# Altium PCB BF83080_PCB.pcbdoc
Units mil, origin at the board's own origin, x right, y up, seen from the top; angles counter-clockwise.
Board outline 1489.2 x 1603.3 mil, 2 copper layers (Top Layer, Bottom Layer), stack 62.2 mil thick; 25 components, 19 nets, 101 pads, 40 vias.
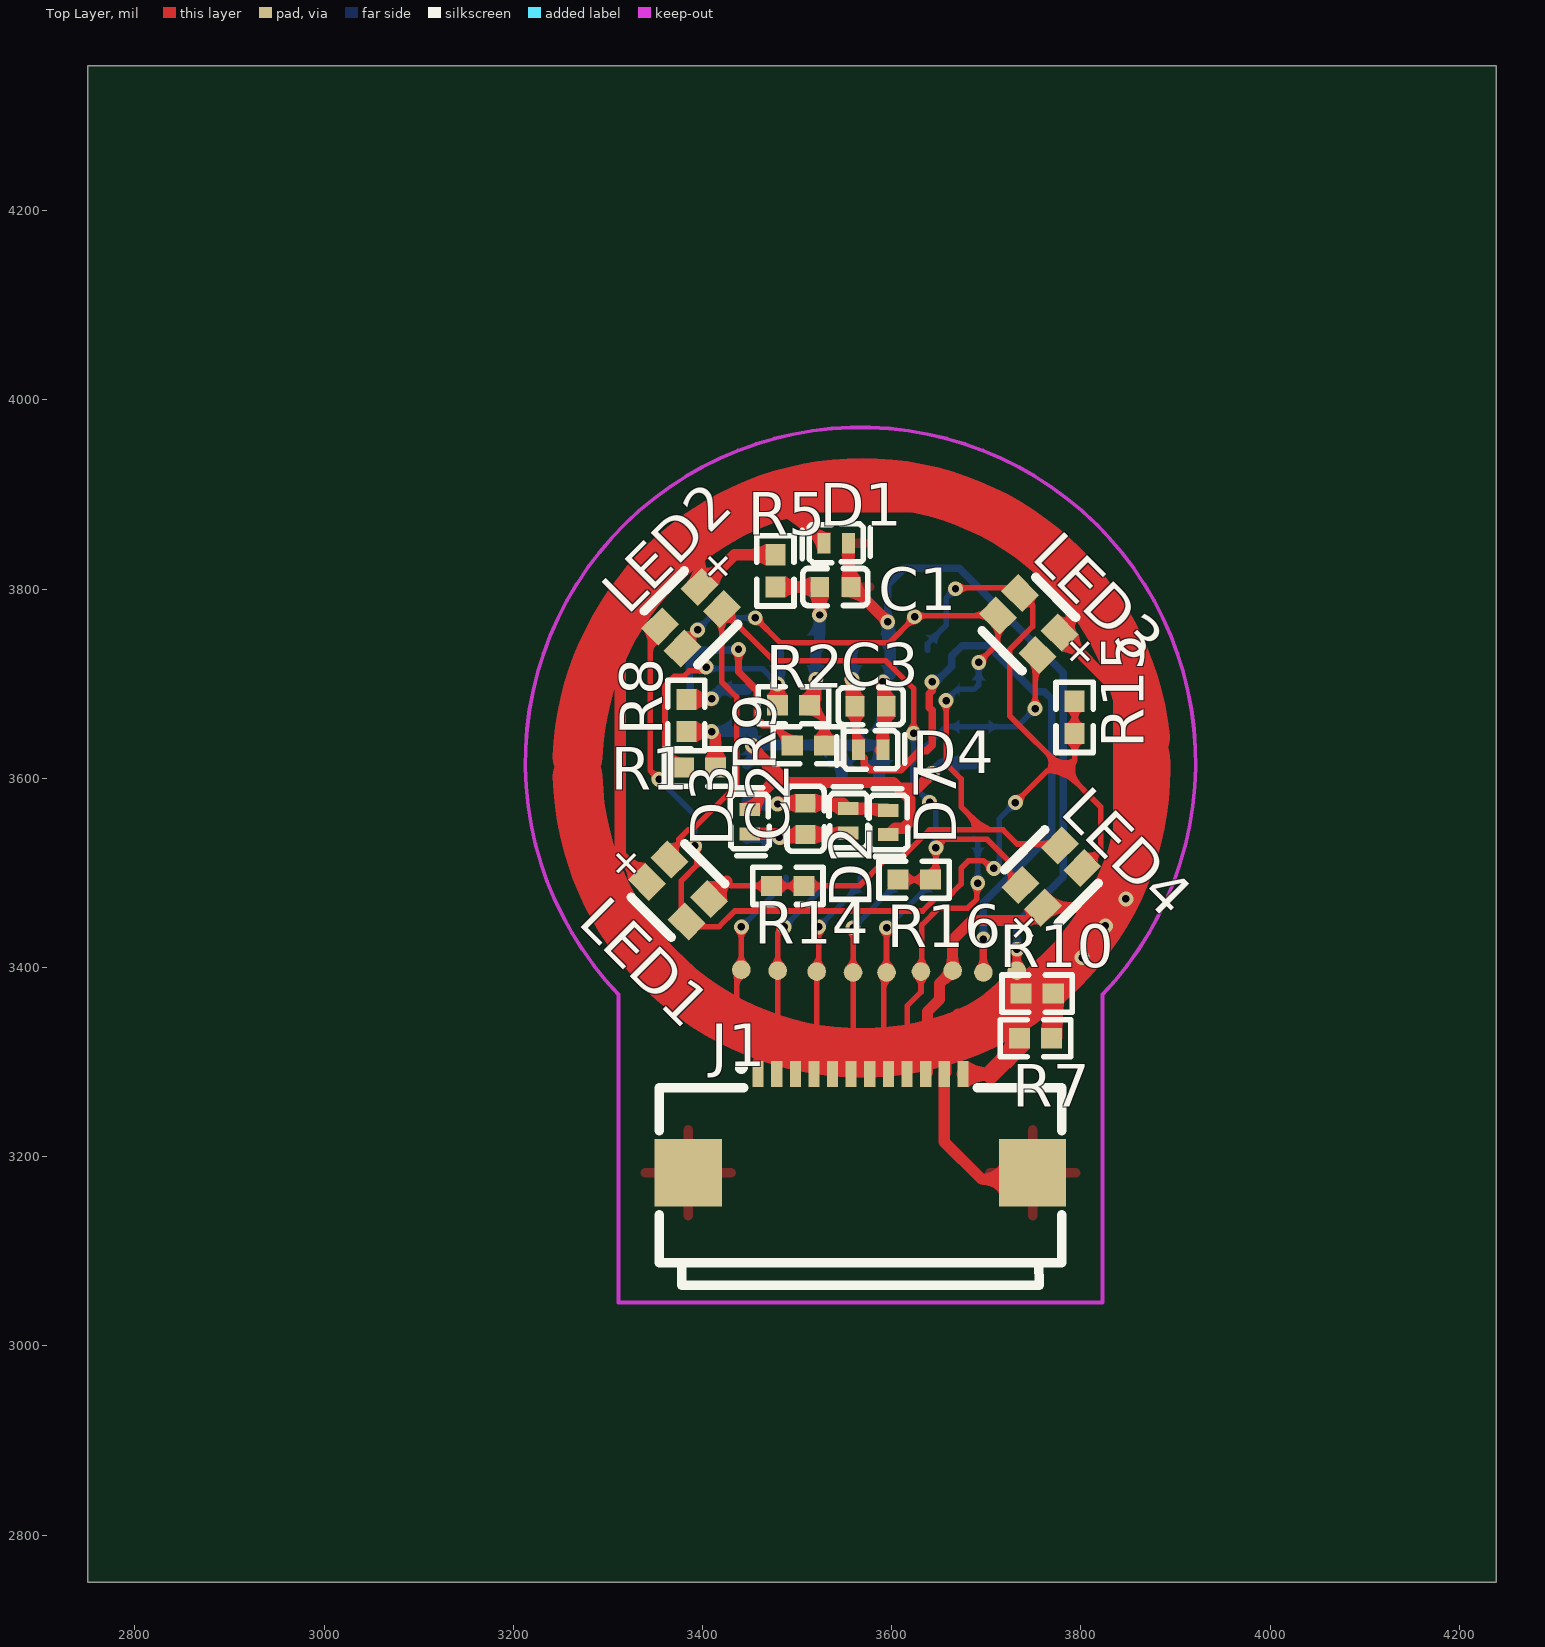
[diagram p0: Top Layer view]
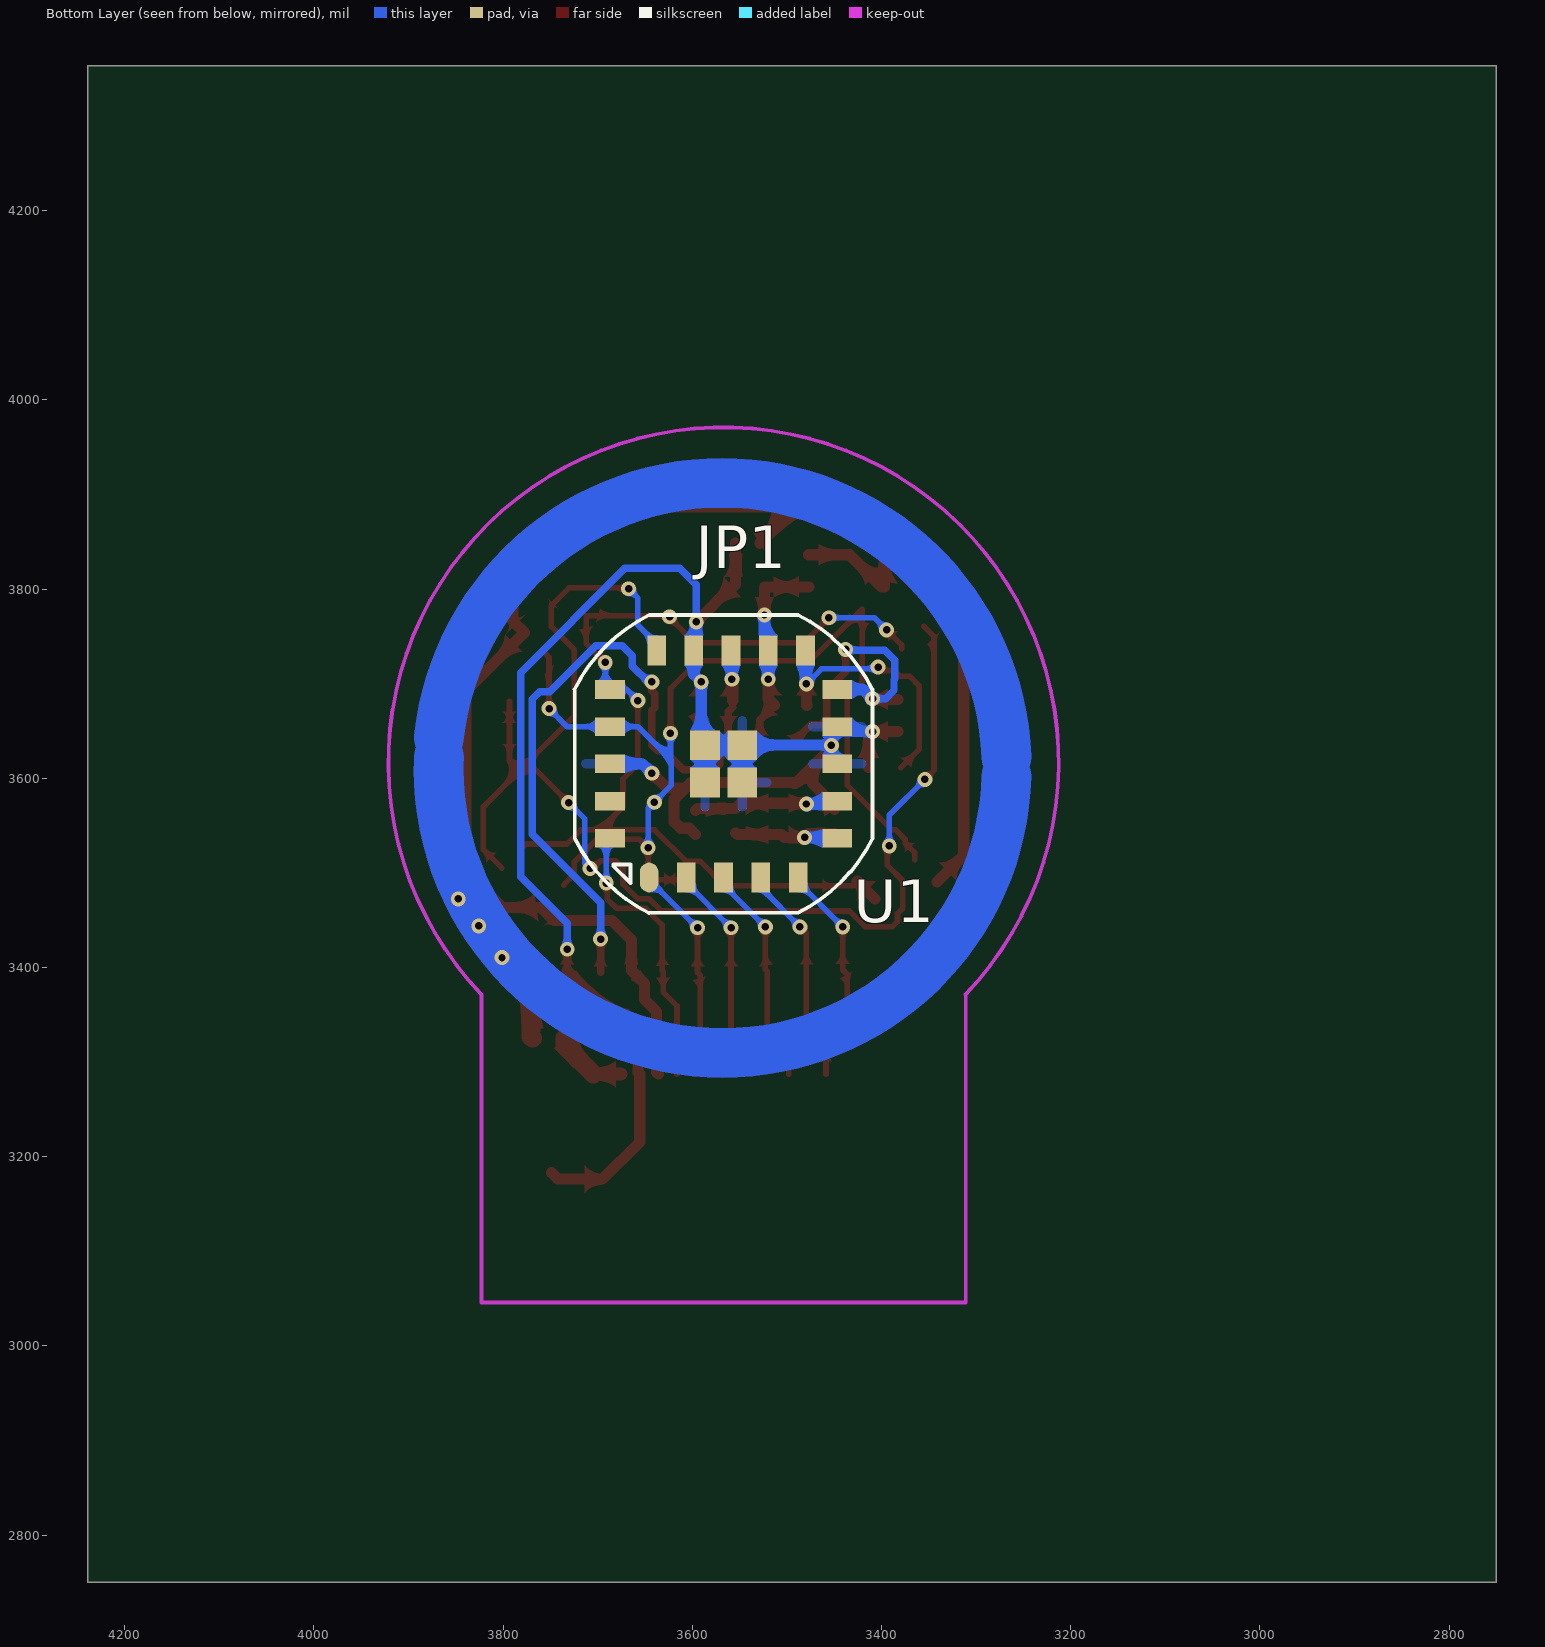
[diagram p1: Bottom Layer view, seen from below]

## Layer stack, top to bottom
Top Solder Mask Layer: solder mask 0.4, Dk 3.3
Top Layer: signal copper 1.4
Dielectric1: surface 59.4, FR4, Dk 4.5
Bottom Layer: signal copper 1.4
Bottom Solder Mask Layer: solder mask 0.4, Dk 3.3

## Board outline
4239.2,2750 2750,2750 2750,4353.3 4239.2,4353.3

## Design rules (kind name [scope] priority, off if disabled: settings)
BoardOutlineClearance copperThickness1oz [All] p0: genericclearance=10 ignorepadtopadclearanceinfootprint=FALSE except(0: Arc-SplitContinuation Track-SplitContinuation SMDPad-SplitContinuation THPad-SplitContinuation Via-SplitContinuation Fill-SplitContinuation Poly-SplitContinuation Region-SplitContinuation Text-SplitContinuation)
BoardOutlineClearance copperThickness2oz [All] p0: genericclearance=10 ignorepadtopadclearanceinfootprint=FALSE except(0: Arc-SplitContinuation Track-SplitContinuation SMDPad-SplitContinuation THPad-SplitContinuation Via-SplitContinuation Fill-SplitContinuation Poly-SplitContinuation Region-SplitContinuation Text-SplitContinuation)
BoardOutlineClearance otherClearance [All] p0: genericclearance=10 ignorepadtopadclearanceinfootprint=FALSE except(0: Arc-SplitContinuation Track-SplitContinuation SMDPad-SplitContinuation THPad-SplitContinuation Via-SplitContinuation Fill-SplitContinuation Poly-SplitContinuation Region-SplitContinuation Text-SplitContinuation)
Clearance copperThickness1oz [All] p1: gap=7 ignorepadtopadclearanceinfootprint=FALSE
Clearance copperThickness2oz [All] p1: gap=7 ignorepadtopadclearanceinfootprint=FALSE
Clearance otherClearance [All] p1: gap=7 ignorepadtopadclearanceinfootprint=FALSE
DiffPairsRouting differentialPair [All] p1: maxuncoupledlength=10 minlimit=6 maxlimit=Infinity mostfreqgap=6 toplayer_minwidth=5 toplayer_prefwidth=10 toplayer_maxwidth=100 bottomlayer_minwidth=5 bottomlayer_prefwidth=10 bottomlayer_maxwidth=100
PasteMaskExpansion pasteMaskExpansion [All] p1: expansion=0
PlaneConnect innerPlane [All] p1: planeconnectstyle=Relief reliefexpansion=20 reliefentries=4 reliefconductorwidth=10 reliefairgap=10
PolygonConnect copperRegion [All] p1: connectstyle=Relief reliefentries=4 reliefconductorwidth=10 polygonreliefangle="90 Angle" airgapwidth=10
RoutingVias viaSize [All] p1: viastyle="Through Hole" holewidth=15.748 minholewidth=3.937 maxholewidth=248.0314 width=15.748 minwidth=3.937 maxwidth=248.0314
SolderMaskExpansion solderMaskExpansion [IsVia] p1: useseparateexpansions=TRUE expansion=-1000 expansionbottom=-1000
SolderMaskExpansion solderMaskExpansion [All] p2: useseparateexpansions=TRUE expansion=2 expansionbottom=2
Width copperThickness1oz [All] p1: maxlimit=100 minlimit=5 preferedwidth=10
Width copperThickness2oz [All] p1: maxlimit=100 minlimit=8 preferedwidth=10

## Components (designator, comment, footprint, x,y, rotation, side; value= is the part's Value field where it differs from the comment)
C1 "2.2uF" C0402 3540.4,3802.2 r180 top
C2 "2.2uF" C0402 3508.9,3557.1 r270 top
C3 "2.2uF" C0402 3577.8,3676.2 r180 top
D1 "TVS_5V" X1-DFN1006-2_L1.0-W0.6-P0.65-BI#1 3541.4,3848.4 r180 top
D2 "TVS_5V" X1-DFN1006-2_L1.0-W0.6-P0.65-BI#1 3554.2,3555.1 r270 top
D3 "TVS_5V" X1-DFN1006-2_L1.0-W0.6-P0.65-BI#1 3449.8,3554.1 r270 top
D4 "TVS_5V" X1-DFN1006-2_L1.0-W0.6-P0.65-BI#1 3577.8,3629.9 r180 top
D7 "RSCD5T6MB" X1-DFN1006-2_L1.0-W0.6-P0.65-BI#2 3596.5,3553.1 r270 top
J1 "KH-1.27FH-1X14P-H4.3" FPC-SMD_12P-P0.50_L10.7-W5.3 3567,3235.2 r0 top
JP1 "" Metal_Ring_16.65mm 3567.9,3612.2 r0 top
LED1 "" LED-SMD_4P-L1.6-W1.5-TL-A#1 3374,3481.3 r315 top
LED2 "" LED-SMD_4P-L1.6-W1.5-TL-A#2 3387.8,3769.7 r225 top
LED3 "" LED-SMD_4P-L1.6-W1.5-TL-A#2 3744.9,3763 r135 top
LED4 "" LED-SMD_4P-L1.6-W1.5-TL-A#3 3768.7,3496.1 r45 top
R1 "0Ω" R0402#1 3396.7,3611.2 r0 top
R2 "0Ω" R0402#2 3496.1,3677.2 r0 top
R5 "0Ω" R0402#1 3477,3819.3 r90 top
R7 "0Ω" R0402#3 3751.9,3325.1 r0 top
R8 "0Ω" R0402#1 3382.9,3666.3 r270 top
R9 "0Ω" R0402#3 3511.8,3634.8 r0 top
R10 "0Ω" R0402#1 3753.7,3372.4 r0 top
R14 "47Ω" R0402#3 3490.2,3486.2 r180 top
R15 "47Ω" R0402#3 3793.3,3664.4 r270 top
R16 "47Ω" R0402#1 3623.7,3492.8 r180 top
U1 "" BF83080C_4_FP 3567,3615.2 r90 top locked

## Footprints (in the part's own frame and the unit in brackets; to place one, negate y for a bottom-side part, rotate by r counter-clockwise, add the part's x,y. Pads: shape width x height; smd on the part's side, far side on the other; paste and mask are expansions set on the pad)
BF83080C_4_FP [mil]
  oval 31.5x19.7 smd far side: 1(-120.1,-78.7)
  rect 31.5x19.7 smd far side: 2(-120.1,-39.3) 3(-120.1,0) 4(-120.1,39.4) 5(-120.1,78.8) 11(120,86.7) 12(120,47.3) 13(120,7.9) 14(120,-31.5) 15(120,-70.8)
  rect 19.7x31.5 smd far side: 6(-78.8,120.1) 7(-39.4,120.1) 8(0,120.1) 9(39.3,120.1) 10(78.7,120.1) 16(78.7,-120) 17(39.3,-120) 18(0,-120) 19(-39.4,-120) 20(-78.8,-120)
  rect 31.5x31.5 smd far side: 21(-19.7,-19.6) 22(19.6,-19.6) 23(19.6,19.7) 24(-19.7,19.7)
C0402 [mil]
  rect 19.7x21.3 smd: 1(-16.5,0) 2(16.6,0)
  silkscreen extent -34,-20 34,20
FPC-SMD_12P-P0.50_L10.7-W5.3 [mil]
  rect 11.8x27.6 smd paste+0 mask+2: 1(-108.3,52.1) 2(-88.6,52.1) 3(-68.9,52.1) 4(-49.3,52.1) 5(-29.6,52.1) 6(-9.9,52.1) 7(9.8,52.1) 8(29.5,52.1) 9(49.2,52.1) 10(68.9,52.1) 11(88.5,52.1) 12(108.2,52.1)
  rect 70.9x70.9 smd paste+0 mask+2: 13(182,-52.2) 14(-182.1,-52.2)
  silkscreen extent -213,-171 213,61
LED-SMD_4P-L1.6-W1.5-TL-A#1 [mil]
  rect 31.5x25.6 smd paste+0 mask+2: 1(-29.49,16.76) 2(29.63,16.76) 3(-29.56,-16.69) 4(29.56,-16.69)
  silkscreen extent -30,-40 30,40
LED-SMD_4P-L1.6-W1.5-TL-A#2 [mil]
  rect 31.5x25.6 smd paste+0 mask+2: 1(-29.49,16.76) 2(29.49,16.76) 3(-29.56,-16.69) 4(29.56,-16.69)
  silkscreen extent -30,-40 30,40
LED-SMD_4P-L1.6-W1.5-TL-A#3 [mil]
  rect 31.5x25.6 smd paste+0 mask+2: 1(-29.56,16.69) 2(29.56,16.69) 3(-29.49,-16.76) 4(29.49,-16.76)
  silkscreen extent -30,-40 30,40
Metal_Ring_16.65mm [mil]
  round 0 smd far side: 0(0,155.1) 1(0.2,-146.3)
  Top Layer region: 162 vertices and 0 holes, not listed, extent -326,-16.1 326.1,326.2
  Top Layer region: 175 vertices and 0 holes, not listed, extent -326,-328.7 326.4,36.1
  Bottom Layer region: 162 vertices and 0 holes, not listed, extent -326,-16.1 326.1,326.2
  Bottom Layer region: 175 vertices and 0 holes, not listed, extent -326,-328.7 326.4,36.1
  Multi-Layer region: 162 vertices and 0 holes, not listed, extent -326,-16.1 326.1,326.2
  Multi-Layer region: 175 vertices and 0 holes, not listed, extent -326,-328.7 326.4,36.1
R0402#1 [mil]
  rect 22.3x21.3 smd paste-3937 mask+2: 1(-17.1,0) 2(17,0)
  silkscreen extent -37,-20 37,20
R0402#2 [mil]
  rect 22.3x21.3 smd paste-3937 mask+2: 1(-17,0) 2(17,0)
  silkscreen extent -37,-20 37,20
R0402#3 [mil]
  rect 22.3x21.3 smd paste-3937 mask+2: 1(-17,0) 2(17.1,0)
  silkscreen extent -37,-20 37,20
X1-DFN1006-2_L1.0-W0.6-P0.65-BI#1 [mil]
  rect 13.8x21.7 smd: 1(-12.8,0) 2(12.8,0)
  silkscreen extent -36,-21 36,20
X1-DFN1006-2_L1.0-W0.6-P0.65-BI#2 [mil]
  rect 13.8x21.7 smd: 1(-12.8,0) 2(12.7,0)
  silkscreen extent -36,-21 36,21

## Free pads (board coordinates)
  round 19.7 smd: 1(3441,3397.6) 3(3479.4,3396.7) 5(3520.7,3395.7) 7(3559.1,3394.7) 8(3594.5,3394.7) 9(3630.9,3395.7) 10(3664.4,3396.7) 11(3732.3,3396.7) 12(3696.9,3394.7)

## Via types
v1: diameter 15.7, hole 7.9, Top Layer to Bottom Layer, 40 vias

## Nets (pads, with @x,y where several pads share a name; then routed paths per layer and width w, separated by ;. In a path a pad name is that pad's centre, name@x,y a point inside that pad or via, vN(x,y) a via of type N, cw(c..) or ccw(c..) an arc to the next point about the centre after c; other vN are vias at no path point)
AVDD: C1.2 R2.2 R5.1 R9.2 U1.12 | length 225.2
  Top Layer w7.9: R2.2 3528.9,3661.4 R9.2
  Top Layer w11.8: R5.1 C1.2 v1(3523.8,3772.6) ; R2.2 3519.7,3683.7 v1(3519.7,3704.7)
  Bottom Layer w11.8: v1(3519.7,3704.7) U1.12 3523.8,3739.4 v1(3523.8,3772.6)
EN_VDDIO: R8.1 R9.1 U1.10 | length 315.2
  Top Layer w7.9: v1(3438,3736.2) 3438,3712.5 3458,3692.5 3458,3662.4 3463.8,3656.6 3474.9,3656.6 3494.8,3636.8 R9.1
  Top Layer w11.8: R8.1 3408.8,3683.4 v1(3409.5,3684.1)
  Bottom Layer w7.9: v1(3409.5,3684.1) 3395.7,3684.1 3386.8,3692.9 3386.8,3704 3385.9,3705 3385.9,3724.9 3396.4,3735.3 3437.1,3735.3 v1(3438,3736.2)
  Bottom Layer w11.8: v1(3409.5,3684.1) 3419.3,3693.9 U1.10
ESD_GND: J1.12 R7.1 | length 79.9
  Top Layer w13.8: J1.12 3704.8,3287.3
  Top Layer w19.7: 3704.8,3287.3 3734.9,3317.4 R7.1
ESD_GND0: JP1.0 JP1.1 R7.2 R10.2 | length 179.8
  Top Layer w19.7: R7.2 3770.7,3326.8 R10.2 3801.2,3402.9 v1(3801.2,3410.4) 3825.8,3435 v1(3825.8,3443.9) 3847.5,3465.6 v1(3847.5,3472.4)
FVDD: C2.1 D2.1 D7.1 U1.7 | length 151.4
  Top Layer w11.8: v1(3479.4,3572.8) 3480.2,3573.6 C2.1@3505.9,3573.6 ; C2.1 3548.5,3573.6 D2.1 3594.5,3567.9 D7.1
  Bottom Layer w11.8: U1.7 3449.8,3572.8 v1(3479.4,3572.8)
FVSS: C2.2 D2.2 D3.2 U1.6 | length 139.9
  Top Layer w11.8: D3.2 3477.4,3541.3 v1(3481.3,3537.4) 3502.8,3537.4 C2.2@3505.9,3540.5 ; C2.2 3552.4,3540.5 D2.2
  Bottom Layer w11.8: U1.6 3447.9,3537.4 v1(3481.3,3537.4)
GND: C1.1 C3.1 D1.1 D3.1 D4.1 D7.2 J1.11 J1.13 J1.14 pad.11 R1.2 R8.2 R10.1 U1.8 U1.9 U1.14 U1.18 U1.21 U1.22 U1.23 U1.24 | length 2070.8
  Top Layer w7.9: pad.11 v1(3732.3,3419.3)
  Top Layer w11.8: R8.2 v1(3409.5,3649.3) 3413.7,3645.1 R1.2 ; D3.1 3459.6,3576.7 3459.6,3581 3473,3594.4 3473,3612.4 ; v1(3452.9,3634.8) 3452.9,3632.5 3473,3612.4 ; D1.1 3554.2,3804.9 C1.1 3559.1,3802.2 3595.8,3765.4 v1(3595.8,3765.3) ; D4.1@3587.6,3629.9 3590.4,3632.7 3590.4,3675.2 3590.4,3701.6 v1(3590.6,3701.8) ; D7.2 3603.3,3547.2 3612.2,3547.2 3619.2,3554.1 3619.2,3577.8 3607.4,3589.6 ; v1(3642.7,3605.3) 3627,3589.6 3607.4,3589.6 ; pad.11 3686.6,3350.9 ; R10.1 3715.2,3350.9 3686.6,3350.9 ; J1.13 3742.2,3176.2 3694.9,3176.2 3655.5,3215.5 J1.11 3657.4,3289.2 3657.4,3338 3670.3,3350.9 3686.6,3350.9 ; 3473,3612.4 3490.9,3594.5 3492.5,3594.5 3493.3,3595.4 3601.6,3595.4 3607.4,3589.6
  Bottom Layer w7.9: v1(3595.8,3765.3) 3595.8,3804.4 3613.2,3821.9 3671.3,3821.9 3781.5,3711.6 3781.5,3496.1 3732.3,3446.9 v1(3732.3,3419.3)
  Bottom Layer w11.8: v1(3409.5,3649.3) 3441.7,3649.3 U1.9 3452.9,3648.5 v1(3452.9,3634.8) ; U1.8 3452.9,3621.2 v1(3452.9,3634.8) ; U1.24 U1.23 ; U1.21 U1.22 ; v1(3595.8,3765.3) 3595.8,3740.9 3598.5,3738.3 U1.14 3598.5,3709.6 v1(3590.6,3701.8) 3590.6,3638.8 U1.22 ; v1(3642.7,3605.3) 3652.6,3615.2 U1.18 ; v1(3452.9,3634.8) 3453.3,3635.2 3547,3635.2 U1.23 ; U1.23 U1.22
LED_B: LED1.4 LED2.4 LED3.4 LED4.4 R15.1 R15.2 U1.15 | length 1440.3
  Top Layer w5.9: v1(3354.1,3598.8) 3344.5,3608.4 3344.5,3750 LED2.4 ; v1(3391.8,3528.5) 3394.1,3526.2 3394.1,3508.2 3377.6,3491.7 3377.6,3462.4 3383.1,3456.9 LED1.4 3388.6,3443.1 3417.4,3443.1 3434,3459.7 3632.7,3459.7 3645.5,3472.5 3657.6,3472.5 3673.3,3488.2 3673.3,3504.9 3681.1,3512.8 3696.9,3512.8 3705,3504.7 v1(3708,3504.7) ; v1(3667.4,3800.4) 3668.2,3801.2 3730.4,3801.2 LED3.4 3749,3782.5 3749,3760.3 3724.8,3736.1 3724.8,3666 3782.7,3608.1 ; v1(3730.8,3574.3) 3764.7,3608.1 3782.7,3608.1 ; R15.1 R15.2 3793.3,3618.8 3782.7,3608.1 ; LED4.4 3820.9,3524.6 3820.9,3569.9 3782.7,3608.1
  Bottom Layer w5.9: v1(3354.1,3598.8) 3391.8,3561.2 v1(3391.8,3528.5) ; U1.15 3637.8,3742.1 3657.5,3761.8 3657.5,3790.5 v1(3667.4,3800.4) ; v1(3708,3504.7) 3713.6,3510.3 3713.6,3557.1 v1(3730.8,3574.3)
LED_G: LED1.2 LED2.2 LED3.2 LED4.2 R14.1 R14.2 U1.16 | length 1061.4
  Top Layer w5.9: LED2.2 3378.8,3740.9 v1(3394.7,3756.9) ; 3425.6,3491.1 3430.5,3486.2 R14.2 R14.1 3565.7,3486.2 3591.9,3512.4 3606.9,3512.4 3639.9,3545.4 3697.8,3545.4 ; v1(3455.7,3769.7) 3482.3,3743.1 3597.4,3743.1 3623.1,3768.8 3623.1,3769.7 v1(3624.1,3770.7) 3625.4,3772 LED3.2 3712.2,3742.7 v1(3692,3722.4) ; v1(3657.5,3682.1) 3657.5,3615.2 3673.3,3599.4 3673.3,3569.9 3697.8,3545.4 ; LED4.2 3776,3530.5 3732.6,3530.5 3717.7,3545.4 3697.8,3545.4
  Top Layer w11.8: LED1.2 3425.6,3491.1
  Bottom Layer w5.9: v1(3394.7,3756.9) 3407.5,3769.7 v1(3455.7,3769.7) ; v1(3657.5,3682.1) 3669.3,3693.9 U1.16 3692,3698.8 v1(3692,3722.4)
LED_R: LED1.1 LED2.1 LED3.1 LED4.1 R16.1 R16.2 U1.17 | length 1118.6
  Top Layer w5.9: LED1.1 3365,3521.5 3375,3531.4 3375,3535.5 3384.8,3545.4 3388.9,3545.4 3436.1,3592.5 3436.1,3686 3420.5,3701.5 LED2.1 3474.9,3724.4 3593.5,3724.4 3623.1,3694.9 v1(3623.1,3647.6) ; R16.2 R16.1 3646.7,3498.7 v1(3646.7,3526.6) 3655.5,3535.4 3701,3535.4 3724.8,3511.6 3724.8,3498.3 LED4.1 ; v1(3751.5,3673.7) 3751.5,3727.9 LED3.1
  Bottom Layer w5.9: v1(3623.1,3647.6) 3623.1,3620.1 ; v1(3646.7,3526.6) 3646.7,3568.1 v1(3640.1,3574.6) 3622.1,3592.7 3622.1,3619.1 3623.1,3620.1 ; v1(3751.5,3673.7) 3732.3,3654.5 U1.17 3657.5,3654.5 3623.1,3620.1
SPI_CLK: J1.5 pad.5 U1.3 | length 233.9
  Top Layer w5.9: v1(3522.7,3442.9) 3522.7,3397.6 pad.5 3520.7,3334.6 3537.4,3317.9 J1.5
  Bottom Layer w5.9: v1(3522.7,3442.9) 3567,3487.2 U1.3
SPI_INT: J1.8 pad.8 U1.1 | length 232.3
  Top Layer w5.9: v1(3594.5,3441.9) pad.8 3591.6,3391.8 3591.6,3292.1 J1.8
  Bottom Layer w5.9: v1(3594.5,3441.9) 3645.7,3493.1 U1.1
SPI_MISO: J1.3 pad.3 U1.4 | length 235.5
  Top Layer w5.9: v1(3486.3,3442.9) 3479.4,3436 pad.3 3479.4,3332.7 3498.1,3314 J1.3
  Bottom Layer w5.9: v1(3486.3,3442.9) 3526.6,3483.3 3526.6,3490.2 3527.6,3491.1 U1.4
SPI_MOSI: J1.1 pad.1 U1.5 | length 238.7
  Top Layer w5.9: v1(3441,3442.9) pad.1 3436.1,3392.7 3436.1,3335.6 3458.7,3313 J1.1
  Bottom Layer w5.9: v1(3441,3442.9) 3488.2,3490.2 U1.5
SPI_NSS: J1.7 pad.7 U1.2 | length 234.6
  Top Layer w5.9: v1(3559.1,3441.9) pad.7 3559.1,3320.9 3576.8,3303.1 J1.7
  Bottom Layer w5.9: v1(3559.1,3441.9) 3606.3,3489.2 U1.2
SPI_RSTN: J1.9 pad.9 U1.20 | length 299.7
  Top Layer w5.9: J1.9 3616.2,3359.3 3630.9,3374 pad.9 3631.9,3396.7 3631.9,3444.9 3649.6,3462.6 3680.2,3462.6 3690,3472.4 3690,3488.2 v1(3691,3489.2)
  Bottom Layer w5.9: U1.20 3691,3532.5 v1(3691,3489.2)
VCC_3V3: D1.2 J1.10 LED1.3 LED2.3 LED3.3 LED4.3 pad.10 R5.2 | length 1791.5
  Top Layer w11.8: LED1.3 3313,3518.7 3313,3796.3 3387.3,3870.5 3418.8,3870.5 ; R5.2 3433.8,3836.3 3399.9,3802.4 LED2.3 3396.9,3848.6 3418.8,3870.5 ; D1.2 3490.2,3886.8 ; J1.10 3637.7,3289.2 3637.7,3353.3 3650.6,3366.1 3650.6,3382.9 pad.10 3664.4,3429.1 3685,3449.7 3746.1,3449.7 LED4.3 3800.6,3463.4 3839.6,3502.4 3839.6,3691.9 LED3.3 3789.4,3765.7 3789.4,3818.9 3721.5,3886.8 3490.2,3886.8 ; 3418.8,3870.5 3435.1,3886.8 3490.2,3886.8
VCP_RESET: R1.1 R2.1 U1.11 | length 287.6
  Top Layer w5.9: R1.1 3360.3,3630.6 3360.3,3697.8 3370.3,3707.9 3380.4,3707.9 3386.1,3713.6 3399.8,3713.6 v1(3403.7,3717.5)
  Top Layer w11.8: R2.1 3479.4,3677.5 v1(3479.4,3699.8)
  Bottom Layer w5.9: v1(3403.7,3717.5) 3408.5,3717.5 3410.5,3715.6 3463.6,3715.6 v1(3479.4,3699.8)
  Bottom Layer w11.8: v1(3479.4,3699.8) 3480.3,3700.8 U1.11
VDDIO: C3.2 D4.2 pad.12 U1.13 | length 765.4
  Top Layer w7.9: C3.2@3557.3,3675.2 3562,3670.5 3562,3629.9 3570.8,3621.1 3570.8,3615 3576.6,3609.2 3609.8,3609.2 3629.5,3628.9 3636.8,3628.9 3642.7,3634.8 3642.7,3671.7 3639.7,3674.7 3639.7,3689.5 3642.7,3692.5 v1(3642.7,3701.8) ; pad.12 v1(3696.9,3430)
  Top Layer w11.8: C3.2@3557.3,3682.1 3557.3,3703.9 v1(3558.1,3704.7)
  Bottom Layer w7.9: v1(3642.7,3701.8) 3646.8,3701.8 3663.4,3718.4 3663.4,3729.3 3674.3,3740.2 3702.1,3740.2 3750.7,3691.6 3761.4,3691.6 3769.3,3683.8 3769.3,3540.8 3696.9,3468.4 v1(3696.9,3430)
  Bottom Layer w11.8: v1(3558.1,3704.7) 3558.1,3734.3 U1.13
pads on no net: J1.2 J1.4 J1.6 U1.19

## Polygon pours and split planes (outlines as drawn)
GND on Top Layer (solid, remove dead copper, pour order 0): 3150.6,4003.9 3150.6,3018.7 3982.3,3018.7 3982.3,4003.9
GND on Bottom Layer (solid, remove dead copper, pour order 2): 3188,4010.8 3188,3000 3989.2,3000 3989.2,4010.8

## Keep-outs
Board Outline Layer:
  lines w3.9: 3311.1,3371.7 3311.1,3045.9 3822.9,3045.9 3822.9,3371.7 ; 3311.28,3371.47 cw(c3567,3616.7) 3822.72,3371.47 ; 3311,3045.9 cw(c3311.1,3045.9) 3311.2,3045.9 ; 3311,3045.9 ccw(c3311.1,3045.9) 3311.2,3045.9 ; 3311,3045.9 cw(c3311.1,3045.9) 3311.2,3045.9 ; 3311,3045.9 ccw(c3311.1,3045.9) 3311.2,3045.9 ; 3311,3371.7 cw(c3311.1,3371.7) 3311.2,3371.7 ; 3311,3371.7 ccw(c3311.1,3371.7) 3311.2,3371.7 ; 3311,3371.7 cw(c3311.1,3371.7) 3311.2,3371.7 ; 3311,3371.7 ccw(c3311.1,3371.7) 3311.2,3371.7 ; 3822.8,3045.9 cw(c3822.9,3045.9) 3823,3045.9 ; 3822.8,3045.9 ccw(c3822.9,3045.9) 3823,3045.9 ; 3822.8,3045.9 cw(c3822.9,3045.9) 3823,3045.9 ; 3822.8,3045.9 ccw(c3822.9,3045.9) 3823,3045.9

## Other copper
Top Layer:
  drawing of 139 lines, arcs and shapes, not listed
Bottom Layer:
  region net SPI_NSS: 3597.5,3476.2 3593.4,3480.4 3595.1,3483.3 3596.1,3486.4 3596.5,3489.8 3606.9,3479.3 3603.6,3479 3600.4,3477.9
  region net SPI_INT: 3633.7,3476.9 3630.5,3482 3632.4,3484.2 3634.2,3486.3 3635.4,3488.1 3635.9,3489.2 3643.5,3479.6 3642.3,3479.7 3641,3479.7 3638.2,3479.2 3635.6,3478.3 3634.5,3477.6
  region net SPI_MISO: 3522.2,3474.7 3511.9,3472.7 3514.9,3475.9 3517.7,3479.3 3530.1,3479.3 3527.2,3478.2 3524.5,3476.7 3522.2,3474.7
  region net SPI_MOSI: 3478.4,3476.2 3475.2,3481.4 3477,3484.2 3478,3487.4 3478.4,3490.8 3487.8,3479.3 3484.5,3479 3481.3,3477.9
  region net SPI_CLK: 3560.1,3476.2 3554,3478.4 3555.7,3481.3 3556.8,3484.5 3557.1,3487.8 3569.5,3479.3 3566.2,3479 3563,3477.9
  region net FVDD: 3479.4,3578.7 3479.4,3566.9 3471,3566.7 3462.6,3565.9 3462.6,3585.6 3465.5,3583.2 3468.6,3581.3 3472.1,3579.9 3475.7,3579 3479.4,3578.7
  region net FVSS: 3480.3,3543.3 3480.3,3531.5 3475.7,3531.2 3471.2,3530.2 3466.8,3528.7 3462.6,3526.6 3462.6,3546.3 3468.4,3544.6 3474.3,3543.6 3480.3,3543.3
  region net GND: 3458.9,3634.8 3447,3634.8 3446.7,3637.2 3445.9,3639.5 3444.5,3641.5 3442.7,3643 3440.5,3644.1 3438.2,3644.7 3462.6,3644.7 3461,3642.5 3459.8,3640.1 3459.1,3637.5 3458.9,3634.8
  region net GND: 3413.4,3643.4 3413.4,3655.2 3417.5,3655.6 3421.4,3656.7 3425.1,3658.5 3428.4,3661 3431.1,3664.1 3431.1,3644.7 3422.3,3644.4 3413.4,3643.4
  region net EN_VDDIO: 3419.3,3688 3419.3,3699.8 3422.5,3700.1 3425.5,3700.8 3428.5,3702 3431.1,3703.7 3431.1,3684.1 3428.5,3685.7 3425.5,3687 3422.5,3687.7 3419.3,3688
  region net LED_B: 3645.6,3754.1 3650.8,3750.9 3649.1,3748 3648,3744.9 3647.7,3741.5 3636.2,3751 3639.6,3751.3 3642.8,3752.4 3645.6,3754.1
  region net GND: 3604.4,3709.6 3592.5,3709.6 3592.3,3712.3 3591.5,3714.9 3590.3,3717.4 3588.6,3719.5 3608.3,3719.5 3606.6,3717.4 3605.4,3714.9 3604.6,3712.3 3604.4,3709.6
  region net GND: 3589.9,3765.3 3601.7,3765.3 3602,3762.1 3602.8,3758.9 3604.2,3756 3606,3753.3 3608.3,3751 3588.6,3751 3589.6,3758.1 3589.9,3765.3
  region net VDDIO: 3564,3704.7 3552.2,3704.7 3551.9,3709.8 3550.9,3714.7 3549.2,3719.5 3568.9,3719.5 3566.8,3716.1 3565.3,3712.5 3564.3,3708.7 3564,3704.7
  region net AVDD: 3525.6,3704.7 3513.8,3704.7 3513.6,3708.6 3512.8,3712.4 3511.6,3716 3509.9,3719.5 3529.6,3719.5 3527.9,3716 3526.6,3712.4 3525.9,3708.6 3525.6,3704.7
  region net AVDD: 3517.9,3768.7 3529.8,3768.7 3529.6,3759.8 3529.6,3751 3509.9,3751 3512.7,3753.9 3514.9,3757.2 3516.6,3760.8 3517.6,3764.7 3517.9,3768.7
  region net VCP_RESET: 3486.2,3701.8 3474.4,3701.8 3474.2,3706.3 3473.4,3710.8 3472.2,3715.2 3470.5,3719.5 3490.2,3719.5 3488.5,3715.2 3487.2,3710.8 3486.5,3706.3 3486.2,3701.8
  region net GND: 3653.6,3609.3 3653.6,3621.1 3658.1,3621.3 3662.6,3622.1 3667,3623.3 3671.3,3625 3671.3,3605.3 3667,3607 3662.6,3608.3 3658.1,3609 3653.6,3609.3
  region net SPI_RSTN: 3693.9,3517.7 3688,3517.7 3687.7,3520.3 3686.9,3522.7 3685.5,3524.8 3683.6,3526.6 3698.4,3526.6 3696.5,3524.8 3695.1,3522.7 3694.2,3520.3 3693.9,3517.7
  region net LED_R: 3662.4,3651.6 3662.4,3657.5 3665,3657.8 3667.4,3658.6 3669.5,3660.1 3671.3,3661.9 3671.3,3647.1 3669.5,3649 3667.4,3650.4 3665,3651.3 3662.4,3651.6
  region net LED_R: 3711.6,3657.5 3711.6,3651.6 3709.1,3651.3 3706.7,3650.4 3704.5,3649 3702.8,3647.1 3702.8,3661.9 3704.5,3660.1 3706.7,3658.6 3709.1,3657.8 3711.6,3657.5
  region net LED_G: 3669.3,3690.9 3669.3,3696.8 3670.4,3698.1 3671.1,3699.6 3671.3,3701.3 3671.3,3686.5 3671.1,3688.2 3670.4,3689.7 3669.3,3690.9
  region net LED_G: 3689,3712.6 3694.9,3712.6 3695.2,3710.1 3696.1,3707.6 3697.5,3705.5 3699.3,3703.7 3684.6,3703.7 3686.4,3705.5 3687.8,3707.6 3688.7,3710.1 3689,3712.6
  region net GND: 3447,3634.8 3458.9,3634.8 3459.1,3632.2 3459.8,3629.6 3461,3627.2 3462.6,3625 3438.2,3625 3440.5,3625.5 3442.7,3626.6 3444.5,3628.2 3445.9,3630.2 3446.7,3632.4
  region net GND: 3580.7,3628.9 3592.5,3628.9 3592.9,3624.9 3594.1,3620.9 3595.9,3617.2 3598.4,3614 3601.4,3611.2 3571.9,3611.2 3574.9,3614 3577.4,3617.2 3579.2,3620.9 3580.4,3624.9 3580.7,3628.9
  region net GND: 3584.7,3668.3 3596.5,3668.3 3596.9,3663.6 3598,3659 3599.9,3654.6 3602.4,3650.6 3575.8,3650.6 3578.9,3653.3 3581.3,3656.6 3583.2,3660.3 3584.3,3664.2 3584.7,3668.3
  region net GND: 3553.2,3628.9 3553.2,3640.7 3557.3,3641.1 3561.2,3642.3 3564.9,3644.1 3568.1,3646.6 3570.9,3649.6 3570.9,3620.1 3568.1,3623.1 3564.9,3625.6 3561.2,3627.4 3557.3,3628.6 3553.2,3628.9
  region net GND: 3592.5,3601.4 3580.7,3601.4 3580.4,3605.5 3579.2,3609.4 3577.4,3613.1 3574.9,3616.3 3571.9,3619.1 3601.4,3619.1 3598.4,3616.3 3595.9,3613.1 3594.1,3609.4 3592.9,3605.5 3592.5,3601.4
  region net GND: 3580.7,3640.7 3580.7,3628.9 3576.7,3628.6 3572.7,3627.4 3569,3625.6 3565.8,3623.1 3563,3620.1 3563,3649.6 3565.8,3646.6 3569,3644.1 3572.7,3642.3 3576.7,3641.1 3580.7,3640.7
  region net GND: 3513.8,3629.3 3513.8,3641.1 3517.9,3641.4 3521.8,3642.6 3525.5,3644.4 3528.8,3646.9 3531.5,3649.9 3531.5,3620.4 3528.8,3623.4 3525.5,3625.9 3521.8,3627.7 3517.9,3628.9 3513.8,3629.3
  region net GND: 3553.2,3601.4 3541.4,3601.4 3541,3605.5 3539.9,3609.4 3538,3613.1 3535.5,3616.3 3532.5,3619.1 3562,3619.1 3559,3616.3 3556.5,3613.1 3554.7,3609.4 3553.6,3605.5 3553.2,3601.4
  region net GND: 3541.4,3628.9 3553.2,3628.9 3553.6,3624.9 3554.7,3620.9 3556.5,3617.2 3559,3614 3562,3611.2 3532.5,3611.2 3535.5,3614 3538,3617.2 3539.9,3620.9 3541,3624.9 3541.4,3628.9
  region net LED_B: 3363.8,3593.3 3359.6,3589.2 3358.6,3589.8 3357.1,3590.3 3355.4,3590.7 3353.6,3591 3361.9,3599.3 3362.2,3597.6 3362.6,3595.8 3363.2,3594.3
  region net LED_B: 3661.9,3790.7 3657.7,3794.9 3658.3,3795.8 3658.8,3797.3 3659.3,3799.1 3659.5,3800.8 3667.8,3792.5 3666.1,3792.3 3664.3,3791.8 3662.8,3791.3
  region net LED_B: 3388.8,3539.3 3394.7,3539.3 3395,3538.2 3395.6,3536.7 3396.6,3535.2 3397.7,3533.8 3385.9,3533.8 3386.9,3535.2 3387.9,3536.7 3388.6,3538.2
  region net LED_G: 3400.2,3766.6 3404.4,3762.4 3403.8,3761.4 3403.2,3759.9 3402.8,3758.2 3402.6,3756.4 3394.2,3764.7 3396,3765 3397.8,3765.4 3399.3,3766
  region net LED_R: 3630.5,3580.1 3634.7,3584.3 3635.6,3583.7 3637.1,3583.1 3638.9,3582.7 3640.6,3582.5 3632.3,3574.1 3632.1,3575.9 3631.6,3577.7 3631.1,3579.2
  region net LED_R: 3648.8,3570.2 3644.6,3566 3642.9,3566.4 3639.7,3566.7 3648,3575.1 3648.4,3571.9
  region net LED_B: 3725.3,3564.6 3721.2,3568.8 3721.8,3569.8 3722.3,3571.3 3722.7,3573 3723,3574.8 3731.3,3566.5 3729.6,3566.2 3727.8,3565.8 3726.3,3565.2
  region net LED_R: 3626,3636.9 3620.1,3636.9 3619.9,3638 3619.2,3639.5 3618.2,3641 3617.2,3642.4 3629,3642.4 3627.9,3641 3626.9,3639.5 3626.3,3638
  region net LED_G: 3663,3691.8 3667.2,3687.6 3666.6,3686.6 3666,3685.1 3665.6,3683.4 3665.4,3681.6 3657,3689.9 3658.8,3690.2 3660.6,3690.6 3662.1,3691.2
  region net LED_G: 3694.9,3711.7 3689,3711.7 3688.8,3712.8 3688.1,3714.3 3687.1,3715.8 3686.1,3717.2 3697.9,3717.2 3696.8,3715.8 3695.8,3714.3 3695.2,3712.8
  region net LED_R: 3746,3664.1 3741.8,3668.2 3742.4,3669.2 3743,3670.7 3743.4,3672.4 3743.6,3674.2 3752,3665.9 3750.2,3665.6 3748.5,3665.2 3747,3664.6
  region net GND: 3645.3,3616.2 3653.6,3607.8 3652.7,3606.8 3651.8,3605.6 3650.5,3603.3 3649.3,3601.2 3648.3,3599.7 3637.2,3610.9 3638.6,3611.9 3640.7,3613 3643.1,3614.4 3644.2,3615.2
  region net LED_G: 3445,3766.7 3445,3772.6 3446.1,3772.9 3447.6,3773.6 3449.1,3774.5 3450.5,3775.6 3450.5,3763.8 3449.1,3764.9 3447.6,3765.8 3446.1,3766.5
  region net GND: 3418.9,3655.2 3418.9,3643.4 3417.5,3643.3 3416.1,3643.1 3413.5,3642.4 3411.2,3641.7 3409.5,3641.4 3409.5,3657.2 3411.2,3656.9 3413.5,3656.2 3416.1,3655.5 3417.5,3655.3
  region net VCP_RESET: 3469.7,3705.3 3473.9,3709.5 3474.8,3708.9 3476.3,3708.3 3478.1,3707.9 3479.9,3707.7 3471.5,3699.3 3471.3,3701.1 3470.8,3702.9 3470.3,3704.4
  region net VCP_RESET: 3474.4,3710.6 3486.2,3708.3 3486.4,3705.5 3486.8,3702.8 3487.1,3700.6 3487.2,3698.8 3471.6,3701.2 3472.2,3702.9 3473.1,3705.2 3474,3707.8 3474.3,3709.2
  region net AVDD: 3513.8,3714.2 3525.6,3714.2 3525.7,3712.8 3525.9,3711.4 3526.6,3708.8 3527.3,3706.5 3527.6,3704.7 3511.8,3704.7 3512.2,3706.5 3512.8,3708.8 3513.5,3711.4 3513.7,3712.8
  region net GND: 3601.7,3755.9 3589.9,3755.9 3589.8,3757.3 3589.6,3758.7 3588.9,3761.3 3588.2,3763.6 3587.9,3765.3 3603.7,3765.3 3603.4,3763.6 3602.7,3761.3 3602,3758.7 3601.8,3757.3
  region net GND: 3591.9,3776 3599.7,3776 3599.9,3774.7 3600.4,3773.1 3601,3771.6 3601.7,3770.5 3589.9,3770.5 3590.6,3771.6 3591.3,3773.1 3591.7,3774.7
  region net GND: 3596.5,3692.3 3584.7,3692.3 3584.6,3693.7 3584.4,3695.1 3583.7,3697.7 3583,3700 3582.7,3701.8 3598.5,3701.8 3598.1,3700 3597.5,3697.7 3596.8,3695.1 3596.6,3693.7
  region net VDDIO: 3552.2,3714.2 3564,3714.2 3564.1,3712.8 3564.3,3711.4 3565,3708.8 3565.7,3706.5 3566,3704.7 3550.2,3704.7 3550.5,3706.5 3551.2,3708.8 3551.9,3711.4 3552.1,3712.8
  region net AVDD: 3529.8,3763.2 3517.9,3763.2 3517.9,3764.6 3517.6,3766 3517,3768.6 3516.3,3770.9 3516,3772.6 3531.7,3772.6 3531.4,3770.9 3530.7,3768.6 3530.1,3766 3529.8,3764.6
  region net SPI_MOSI: 3446.5,3452.6 3450.6,3448.4 3450.1,3447.5 3449.5,3446 3449.1,3444.2 3448.8,3442.4 3440.5,3450.8 3442.3,3451 3444,3451.4 3445.5,3452
  region net EN_VDDIO: 3398.8,3680.1 3398.8,3688 3400.2,3688.2 3401.7,3688.6 3403.2,3689.2 3404.3,3690 3404.3,3678.1 3403.2,3678.9 3401.7,3679.5 3400.2,3679.9
  region net EN_VDDIO: 3412,3694.9 3420.3,3686.6 3419.4,3685.5 3418.6,3684.4 3417.2,3682 3416.1,3679.9 3415,3678.5 3403.9,3689.6 3405.4,3690.6 3407.5,3691.8 3409.8,3693.2 3410.9,3694
  region net LED_R: 3643.7,3537.3 3649.6,3537.3 3649.9,3536.2 3650.6,3534.8 3651.5,3533.2 3652.6,3531.8 3640.8,3531.8 3641.9,3533.2 3642.8,3534.8 3643.5,3536.2
  region net LED_B: 3711.5,3512.4 3715.7,3508.2 3715.5,3507.9 3715.4,3507.4 3715.5,3506.2 3715.8,3504.2 3707.5,3512.5 3709.5,3512.2 3710.7,3512.1 3711.2,3512.2
  region net FVSS: 3471.9,3531.5 3471.9,3543.3 3473.3,3543.4 3474.7,3543.6 3477.3,3544.3 3479.6,3545 3481.3,3545.3 3481.3,3529.5 3479.6,3529.8 3477.3,3530.5 3474.7,3531.2 3473.3,3531.4
  region net FVDD: 3469.9,3566.9 3469.9,3578.7 3471.3,3578.8 3472.7,3579 3475.3,3579.7 3477.6,3580.4 3479.4,3580.7 3479.4,3565 3477.6,3565.3 3475.3,3565.9 3472.7,3566.6 3471.3,3566.8
  region net SPI_RSTN: 3688,3499.9 3693.9,3499.9 3694.2,3498.8 3694.9,3497.4 3695.8,3495.8 3696.9,3494.4 3685.1,3494.4 3686.2,3495.8 3687.1,3497.4 3687.8,3498.8
  region net SPI_INT: 3600,3451.6 3604.2,3447.4 3603.6,3446.5 3603,3445 3602.6,3443.2 3602.4,3441.4 3594,3449.8 3595.8,3450 3597.6,3450.5 3599.1,3451
  region net SPI_NSS: 3564.6,3451.6 3568.8,3447.4 3568.2,3446.5 3567.6,3445 3567.2,3443.2 3566.9,3441.4 3558.6,3449.8 3560.4,3450 3562.1,3450.5 3563.6,3451
  region net SPI_CLK: 3528.2,3452.6 3532.3,3448.4 3531.8,3447.5 3531.2,3446 3530.8,3444.2 3530.5,3442.4 3522.2,3450.8 3523.9,3451 3525.7,3451.4 3527.2,3452
  region net SPI_MISO: 3491.7,3452.6 3495.9,3448.4 3495.3,3447.5 3494.8,3446 3494.3,3444.2 3494.1,3442.4 3485.8,3450.8 3487.5,3451 3489.3,3451.4 3490.8,3452
  region net VCP_RESET: 3416.1,3718.5 3412.8,3712.6 3410.6,3711.9 3407.3,3710.5 3410.6,3721.4 3411.5,3720.3 3412.9,3719.4 3414.5,3718.7
  region net EN_VDDIO: 3428,3731.4 3426.7,3739.3 3428.1,3739.4 3429.7,3740 3431.1,3740.7 3432.2,3741.5 3433.5,3729.8 3432.4,3730.4 3430.9,3730.9 3429.4,3731.2
  region net VDDIO: 3650.8,3711.4 3653.4,3702.8 3651.3,3700.4 3649.9,3698.5 3645.1,3709.3 3646.4,3709.2 3647.9,3709.6 3649.5,3710.4
  region net GND: 3447,3644.3 3458.9,3644.3 3458.9,3642.9 3459.2,3641.5 3459.8,3638.9 3460.5,3636.6 3460.8,3634.8 3445.1,3634.8 3445.4,3636.6 3446.1,3638.9 3446.7,3641.5 3447,3642.9
  region net GND: 3458.9,3625.4 3447,3625.4 3447,3626.8 3446.7,3628.2 3446.1,3630.8 3445.4,3633.1 3445.1,3634.8 3460.8,3634.8 3460.5,3633.1 3459.8,3630.8 3459.2,3628.2 3458.9,3626.8
  region net GND: 3462.1,3641.1 3462.9,3629.3 3461.4,3629.2 3460.1,3628.9 3457.4,3628.2 3455.2,3627.4 3453.4,3627 3452.6,3642.7 3454.4,3642.5 3456.7,3641.9 3459.3,3641.3
  region net VDDIO: 3692.9,3440.7 3700.8,3440.7 3701,3439.3 3701.4,3437.7 3702.1,3436.3 3702.8,3435.2 3691,3435.2 3691.7,3436.3 3692.3,3437.7 3692.8,3439.3
  region net GND: 3728.4,3430 3736.3,3430 3736.4,3428.6 3736.9,3427.1 3737.5,3425.6 3738.2,3424.5 3726.4,3424.5 3727.1,3425.6 3727.8,3427.1 3728.2,3428.6
  region net LED_R: 3637.7,3630.5 3632.9,3625.2 3628.6,3619.4 3625,3613.2 3622.6,3619.6 3626,3633.1 3629.5,3634 3632.8,3635.5 3635.8,3637.4 3638.5,3639.7 3637.7,3630.5

## Text inside footprints (layer, text, board x,y; h text height)
LED1: Top Silkscreen Layer "+" at 3297.3,3513.5 h31.5 r315
LED2: Top Silkscreen Layer "+" at 3420,3846.4 h31.5 r225
LED3: Top Silkscreen Layer "+" at 3821.6,3730.8 h31.5 r135
LED4: Top Silkscreen Layer "+" at 3736.5,3419.3 h31.5 r45